# Altium PCB PCB1.PcbDoc
Units mm, origin at the board's own origin, x right, y up, seen from the top; angles counter-clockwise.
Board outline 47.4 x 47.4 mm, 2 copper layers (Top Layer, Bottom Layer); 44 components, 38 nets, 185 pads, 41 vias.
Unrouted connection lines stored in the file: 2.
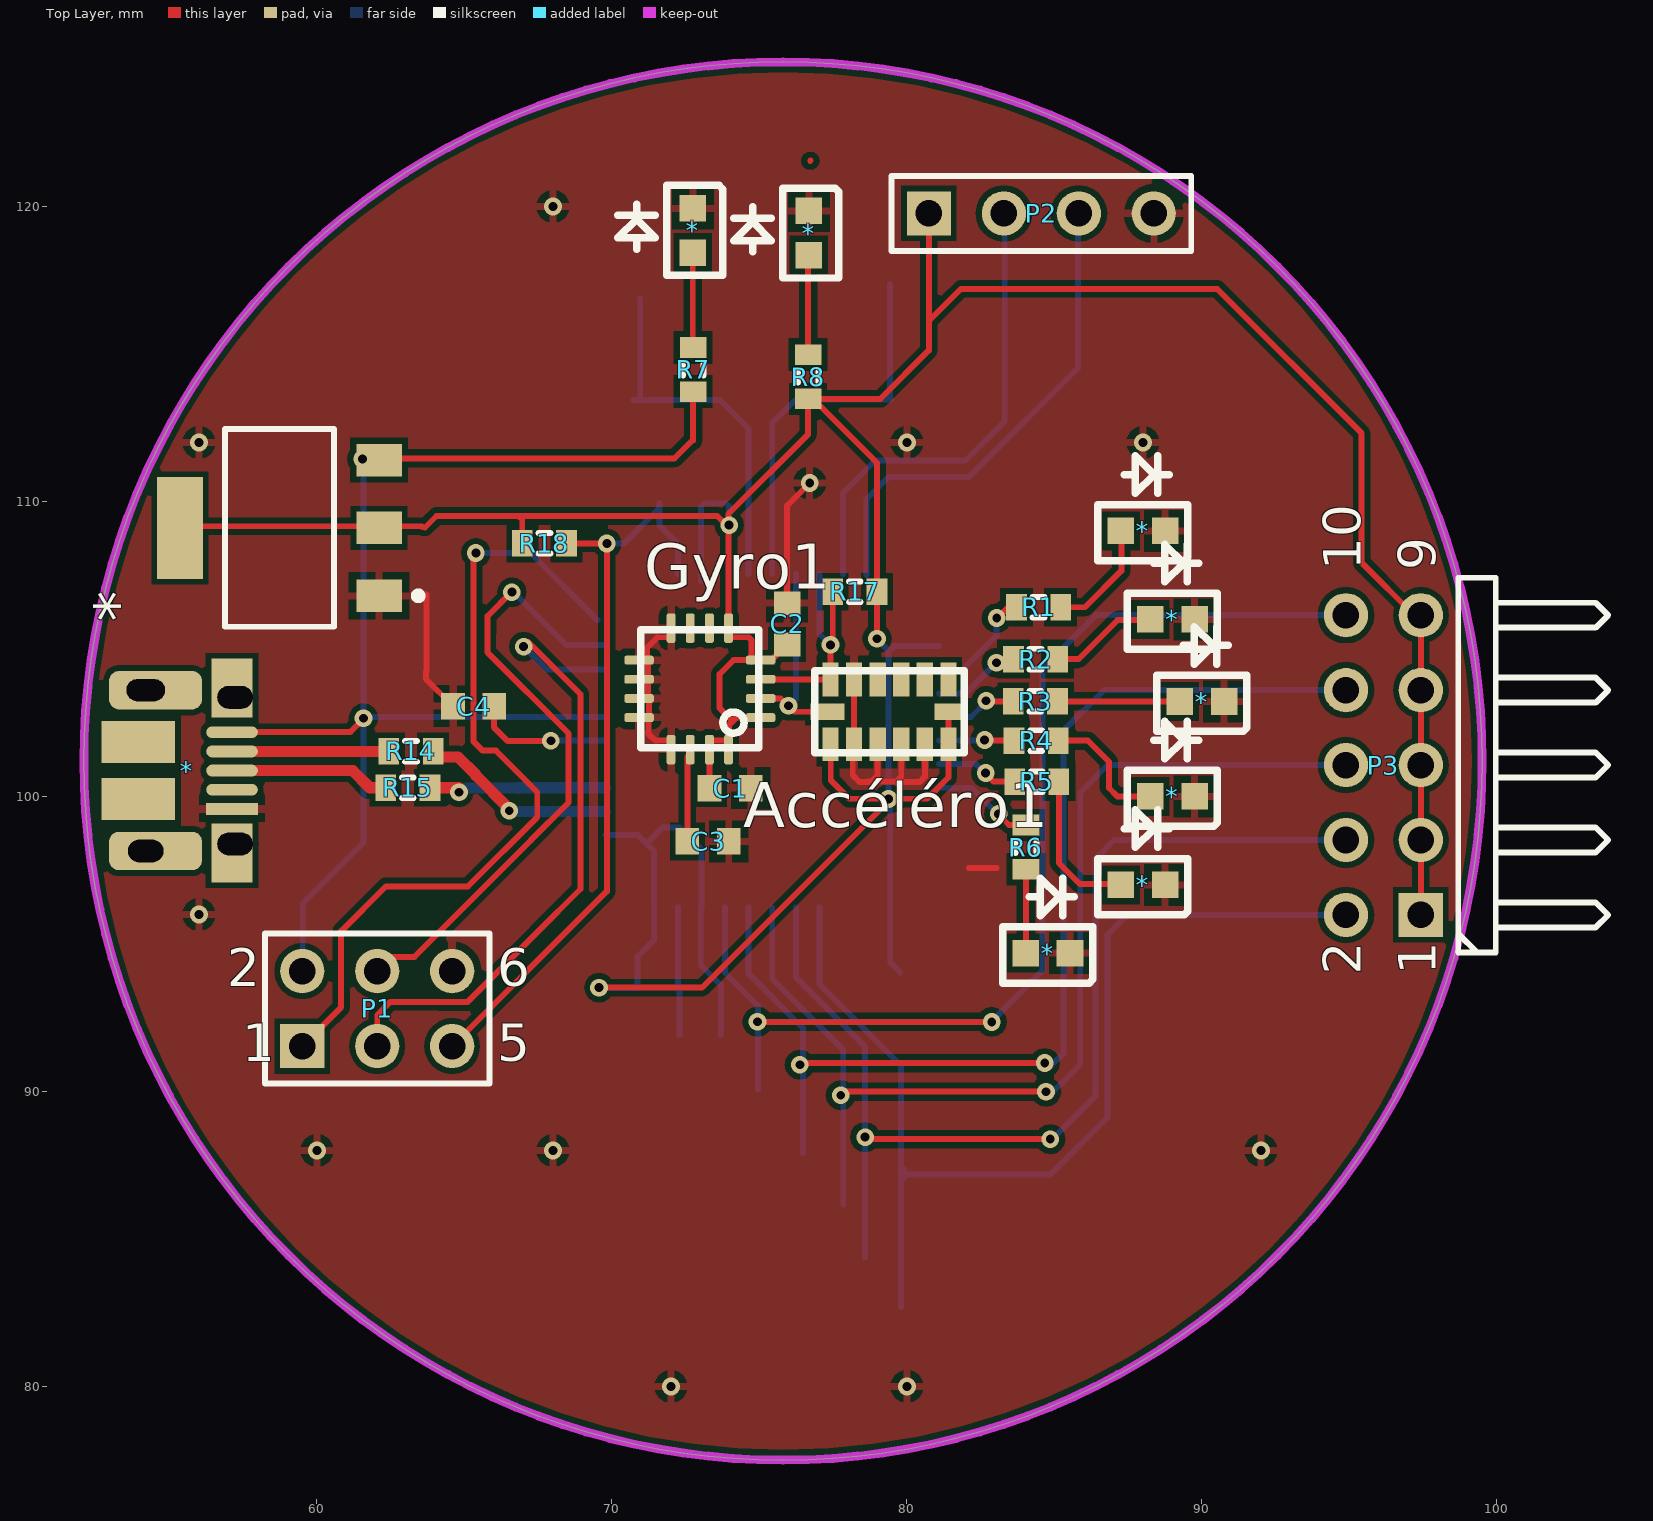
[diagram p0: Top Layer view]
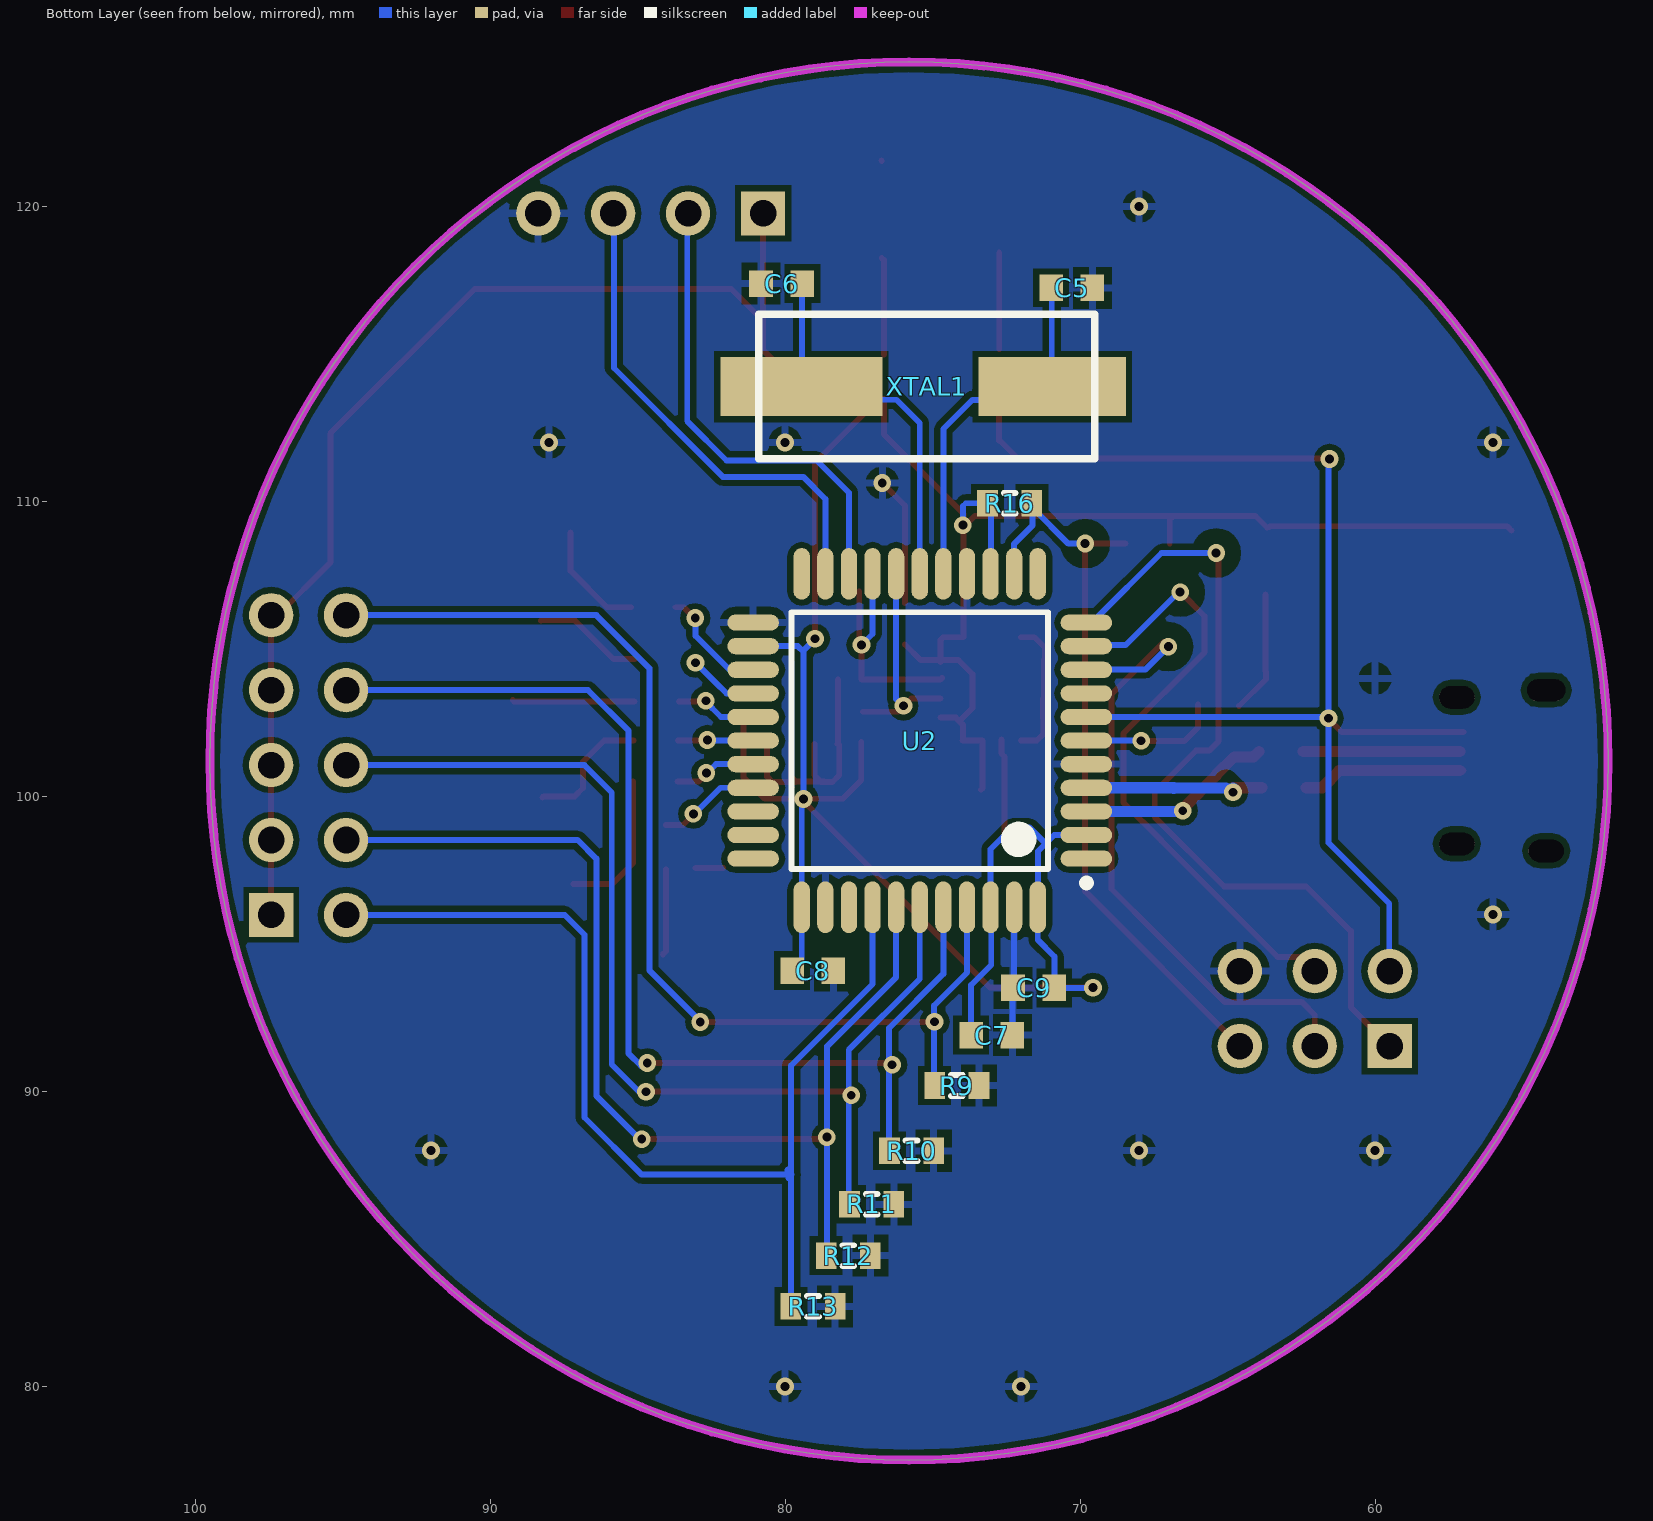
[diagram p1: Bottom Layer view, seen from below]

## Layer stack, top to bottom
Top Solder: solder mask 0.0102, Solder Resist, Dk 3.5
Top Layer: signal copper 0.0356
Dielectric 1: dielectric 0.32, FR-4, Dk 4.8
Bottom Layer: signal copper 0.0356
Bottom Solder: solder mask 0.0102, Solder Resist, Dk 3.5

## Board outline
75.8,77.5 cw(c75.8,101.2) 52.1,101.2 cw(c75.8,101.2) 75.8,124.9 cw(c75.8,101.2) 99.5,101.2 cw(c75.8,101.2)

## Design rules (kind name [scope] priority, off if disabled: settings)
Clearance [All] p1: gap=0.2
DiffPairsRouting [All] p1: maxlimit=0.254 minlimit=0.254 mostfreqgap=0.254 toplayer_minwidth=0.381 toplayer_maxwidth=0.381 toplayer_prefwidth=0.381 bottomlayer_minwidth=0.381 bottomlayer_maxwidth=0.381 bottomlayer_prefwidth=0.381 maxuncoupledlength=12.7
PolygonConnect [All] p1: connectstyle=Relief reliefconductorwidth=0.254 reliefentries=4 polygonreliefangle="90 Angle" airgapwidth=0.254
RoomDefinition handmouse [InComponentClass('handmouse')] p1: confinementstyle=ConfineOut formatcopy=TRUE lockcomponents=FALSE outline 0,0 50.8,0 50.8,25.4 0,25.4
RoutingVias RoutingVias_1 [All] p1: holewidth=0.3 width=0.6 viastyle="Through Hole" minholewidth=0.2 minwidth=0.4 maxholewidth=1 maxwidth=1.27
RoutingVias [All] p2: holewidth=0.6 width=1 viastyle="Through Hole" minholewidth=0.711 minwidth=1.27 maxholewidth=0.711 maxwidth=1.27
SolderMaskExpansion [All] p1: expansion=0.102
UnpouredPolygon [All] p1: allowunpoured=FALSE
Width [All] p1: maxlimit=0.2 minlimit=0.2 preferedwidth=0.2
28 further rules are at their usual default settings.

## Classes and differential pairs
component class handmouse: * Accéléro1 C1 C2 C3 C4 C5 C6 C7 C8 C9 Gyro1 P1 P2 P3 R1 R2 R3 R4 R5 R6 R7 R8 R9 R10 R11 R12 R13 R14 R15 R16 R17 R18 U2 XTAL1
differential pair D: +D_P -D_N
differential pair DR: +DR_P -DR_N

## Components (designator, comment, footprint, x,y, rotation, side; value= is the part's Value field where it differs from the comment)
* "LED" "LED 0603" 84.778,94.688 r0 top
* "LED" "LED 0603" 72.742,119.185 r90 top
* "LED" "LED 0603" 76.675,119.097 r90 top
* "LED" "LED 0603" 88,97 r0 top
* "LED" "LED 0603" 88,109 r0 top
* "LED" "LED 0603" 89,106 r0 top
* "LED" "LED 0603" 90,103.216 r0 top
* "LED" "LED 0603" 89,100 r0 top
* "REG1117-33" SOT-223 58.735,109.101 r90 top
* "microUSB" microUSB 52.498,100.875 r270 top
Accéléro1 "ADXL345" LGA-14 79.409,102.869 r90 top
C1 "Cap Semi" 1608[0603] 74.007,100.279 r180 top
C2 "Cap Semi" 1608[0603] 75.936,105.849 r270 top
C3 "Cap Semi" 1608[0603] 73.261,98.477 r180 top
C4 "Cap Semi" 1608[0603] 65.313,103.062 r180 top
C5 "Cap Semi" 1608[0603] 70.284,117.241 r0 bottom
C6 "Cap Semi" 1608[0603] 80.116,117.382 r180 bottom
C7 "Cap Semi" 1608[0603] 72.996,91.907 r0 bottom
C8 "Cap Semi" 1608[0603] 79.063,94.095 r0 bottom
C9 "Cap Semi" 1608[0603] 71.575,93.506 r180 bottom
Gyro1 "L3GD20" QFN16 72.98,103.645 r180 top
P1 "Header 3X2" HDR2X3 59.504,91.537 r0 top
P2 "Header 4" HDR1X4 80.748,119.762 r0 top
P3 "Header 5X2H" HDR2X5H 97.421,95.982 r90 top
R1 "Res3" J1-0603 84.464,106.413 r180 top
R2 "Res3" J1-0603 84.361,104.654 r180 top
R3 "Res3" J1-0603 84.355,103.223 r180 top
R4 "Res3" J1-0603 84.382,101.893 r180 top
R5 "Res3" J1-0603 84.401,100.498 r180 top
R6 "Res3" J1-0603 84.037,98.28 r90 top
R7 "Res3" J1-0603 72.755,114.469 r90 top
R8 "Res3" J1-0603 76.652,114.226 r90 top
R9 "Res3" J1-0603 74.178,90.199 r180 bottom
R10 "Res3" J1-0603 75.712,87.988 r180 bottom
R11 "Res3" J1-0603 77.066,86.174 r180 bottom
R12 "Res3" J1-0603 77.859,84.437 r180 bottom
R13 "Res3" J1-0603 79.053,82.71 r180 bottom
R14 "Res3" J1-0603 63.189,101.526 r0 top
R15 "Res3" J1-0603 63.083,100.295 r0 top
R16 "Res3" J1-0603 72.387,109.937 r180 bottom
R17 "Res3" J1-0603 78.236,106.939 r0 top
R18 "Res3" J1-0603 67.713,108.579 r0 top
U2 "ATmega32U4-AU" 44ML_N 75.435,101.892 r0 bottom
XTAL1 "Crystal" HC49-CMS 75.195,113.89 r180 bottom

## Footprints (in the part's own frame and the unit in brackets; to place one, negate y for a bottom-side part, rotate by r counter-clockwise, add the part's x,y. Pads: shape width x height; smd on the part's side, far side on the other; paste and mask are expansions set on the pad)
44ML_N [mm] "Thin QFP, 44-Leads, Body 10x10mm, Pitch 0.8mm, IPC Medium Density"
  oval 1.75x0.55 smd: 1(-5.65,4) 2(-5.65,3.2) 3(-5.65,2.4) 4(-5.65,1.6) 5(-5.65,0.8) 6(-5.65,0) 7(-5.65,-0.8) 8(-5.65,-1.6) 9(-5.65,-2.4) 10(-5.65,-3.2) 11(-5.65,-4) 23(5.65,-4) 24(5.65,-3.2) 25(5.65,-2.4) 26(5.65,-1.6) 27(5.65,-0.8) 28(5.65,0) 29(5.65,0.8) 30(5.65,1.6) 31(5.65,2.4) 32(5.65,3.2) 33(5.65,4)
  oval 0.55x1.75 smd: 12(-4,-5.65) 13(-3.2,-5.65) 14(-2.4,-5.65) 15(-1.6,-5.65) 16(-0.8,-5.65) 17(0,-5.65) 18(0.8,-5.65) 19(1.6,-5.65) 20(2.4,-5.65) 21(3.2,-5.65) 22(4,-5.65) 34(4,5.65) 35(3.2,5.65) 36(2.4,5.65) 37(1.6,5.65) 38(0.8,5.65) 39(0,5.65) 40(-0.8,5.65) 41(-1.6,5.65) 42(-2.4,5.65) 43(-3.2,5.65) 44(-4,5.65)
  silkscreen extent -5.77,-4.35 4.35,4.95, body extent -5,-5 5,5, height 1.2
1608[0603] [mm] "Chip Capacitor, Body 1.6x0.8mm, IPC High Density"
  rect 0.8x0.9 smd: 1(-0.7,0) 2(0.7,0)
  body extent -0.87,-0.48 0.87,0.48, height 1.3
HC49-CMS [mm]
  rect 5x2 smd: 1(4.25,0)
  rect 5.5x2 smd: 2(-4.25,0)
  silkscreen extent -5.7,-2.45 5.7,2.45, body extent -6.15,-2.35 6.15,2.35, height 4.31
HDR1X4 [mm] "Connector; Header; 4 Position"
  rect 1.5x1.5 hole 0.9: 1(0,0)
  round 1.5 hole 0.9: 2(2.54,0) 3(5.08,0) 4(7.62,0)
  silkscreen extent -1.27,-1.27 8.89,1.27
HDR2X3 [mm] "Connector; Header; 3x2 Position"
  rect 1.5x1.5 hole 0.9: 1(0,0)
  round 1.5 hole 0.9: 2(0,2.54) 3(2.54,0) 4(2.54,2.54) 5(5.08,0) 6(5.08,2.54)
  silkscreen extent -1.27,-1.27 6.35,3.81
HDR2X5H [mm] "Connector; Header; 5x2 Position; Right Angle"
  rect 1.5x1.5 hole 0.9: 1(0,0)
  round 1.5 hole 0.9: 2(0,2.54) 3(2.54,0) 4(2.54,2.54) 5(5.08,0) 6(5.08,2.54) 7(7.62,0) 8(7.62,2.54) 9(10.16,0) 10(10.16,2.54)
  silkscreen extent -1.27,-6.35 11.43,-1.27
J1-0603 [mm] "Chip Resistor, Body 1.6x0.8mm, IPC High Density"
  rect 0.7x0.9 smd: 1(-0.75,0) 2(0.75,0)
  silkscreen extent -0.2,-0.35 0.2,0.35, body extent -0.85,-0.48 0.85,0.48, height 0.9
"LED 0603" [mm]
  rect 0.9x0.9 smd: 1(-0.75,0) 2(0.75,0)
  silkscreen extent -1.52,-1.02 1.52,2.54, body extent -0.85,-0.45 0.85,0.45
LGA-14 [mm]
  rect 1.145x0.55 smd: 1(-1.098,2) 2(-1.098,1.2) 3(-1.098,0.4) 4(-1.098,-0.4) 5(-1.098,-1.2) 6(-1.098,-2) 8(1.098,-2) 9(1.098,-1.2) 10(1.098,-0.4) 11(1.098,0.4) 12(1.098,1.2) 13(1.098,2)
  rect 0.55x1.145 smd: 7(0,-2.097) 14(0,2.097)
  silkscreen extent -1.4,-2.54 1.4,2.54, body extent -1.52,-2.5 1.48,2.5, height 1.03
microUSB [mm]
  oval 0.4x1.75 smd: 1(-1.3,4.625) 2(-0.65,4.625) 3(0,4.625) 4(0.65,4.625)
  rect 0.4x1.75 smd: 5(1.3,4.625)
  rect 2x1.4 smd: GND(-2.794,4.625) GND(2.794,4.625)
  oct 0.7x1.2 hole 0.75 slot 1.3 at 90 deg: GND(-2.725,1.7)
  rrect50% 1.3x3.15 smd: GND(-2.725,2.032) GND(2.725,2.032)
  oval 0.7x1.2 hole 0.762 slot 1.2 at 90 deg: GND(-2.485,4.73) GND(2.485,4.73) GND(2.725,1.7)
  rect 1.425x2.5 smd: GND(-0.962,1.45) GND(0.962,1.45)
  body extent -4.02,-0.95 4.02,5.6, height 2.73
QFN16 [mm]
  rrect50% 1x0.3 smd: 1(-2.06,0.975) 2(-2.06,0.325) 3(-2.06,-0.325) 4(-2.06,-0.975) 9(2.06,-0.975) 10(2.06,-0.325) 11(2.06,0.325) 12(2.06,0.975)
  rrect50% 0.3x1 smd: 5(-0.975,-2.06) 6(-0.325,-2.06) 7(0.325,-2.06) 8(0.975,-2.06) 13(0.975,2.06) 14(0.325,2.06) 15(-0.325,2.06) 16(-0.975,2.06)
  silkscreen extent -2,-2 2,2, body extent -2.13,-2.13 2.13,2.13, height 0.85
SOT-223 [mm]
  rect 1.1x1.55 smd: 1(-2.3,-3.375) 2(0,-3.375) 3(2.3,-3.375)
  rect 3.45x1.55 smd: 4(0,3.375)
  silkscreen extent -3.35,-4.83 3.35,1.85, body extent -3.25,-3.42 3.25,3.67, height 1.65

## Part data
C1 C2 C3 C4 C5 C6 C7 C8 C9: "Capacitor (Semiconductor SIM Model)"
P1: "Header, 3-Pin, Dual row"
P2: "Header, 4-Pin"
P3: "Header, 5-Pin, Dual row, Right Angle"
R1 R2 R3 R4 R5 R6 R7 R8 R9 R10 R11 R12 R13 R14 R15 R16 R17 R18: "Resistor"
U2: "8-bit AVR Microcontroller, 2.7-5.5V, 32KB Flash, 2.5KB EEPROM, 1KB SRAM, USB Controller, 44-pin TQFP, Industrial Grade (-40°C to 85°C)"

## Via types
v1: diameter 0.6, hole 0.3, Top Layer to Bottom Layer, 41 vias

## Nets (pads, with @x,y where several pads share a name; then routed paths per layer and width w, separated by ;. In a path a pad name is that pad's centre, name@x,y a point inside that pad or via, vN(x,y) a via of type N, cw(c..) or ccw(c..) an arc to the next point about the centre after c; other vN are vias at no path point)
3V3: *.2@62.11,109.101 *.4@55.36,109.101 Accéléro1.1 Accéléro1.6 Accéléro1.7 C1.2 C2.2 C7.2 C8.2 C9.2 Gyro1.1 Gyro1.4 Gyro1.5 Gyro1.15 Gyro1.16 P2.1 P3.1 P3.3 P3.5 P3.7 P3.9 R8.1 R16.2 R17.2 R18.1 U2.2 U2.14 U2.24 U2.34 U2.42 U2.44 | length 146.3
  Top Layer w0.2: *.4@55.38,109.014 55.524,109.158 63.559,109.158 63.586,109.131 ; 63.665,109.118 64.052,109.505 73.568,109.505 v1@73.955,109.118 ; 66.891,109.457 66.963,109.386 R18.1 ; v1(69.564,93.518) 73.052,93.518 v1@79.426,99.891 ; C1.2@73.36,100.225 73.305,100.28 73.305,101.895 Gyro1.16@73.981,101.895 ; Gyro1.16@73.973,101.897 73.973,102.432 74.211,102.67 Gyro1.1@74.73,102.67 ; 74.083,102.561 73.651,102.993 73.651,104.147 74.124,104.62 Gyro1.4@74.73,104.62 ; Gyro1.4@74.736,104.557 74.736,105.297 74.637,105.395 73.955,105.395 v1@73.955,109.118 ; Gyro1.4@74.74,104.629 75.417,104.629 C2.2 ; R8.1@76.865,113.431 78.986,111.31 R17.2 v1(78.986,105.346) ; Accéléro1.1@77.417,101.848 77.417,100.549 78.045,99.921 v1@79.387,99.921 ; v1(79.375,99.909) v1@79.387,99.921 ; P2.1@80.758,119.755 80.746,119.743 80.746,116.117 ; Accéléro1.7@81.473,102.814 81.409,102.75 Accéléro1.6 81.409,100.645 80.685,99.921 v1@79.387,99.921 ; P3.5@97.32,100.957 97.421,100.856 P3.3 ; P3.9@97.365,106.034 97.421,105.978 P3.7 ; P3.7@97.376,103.492 97.421,103.448 P3.5 ; P3.3@97.383,98.445 97.421,98.407 P3.1 ; P3.9@97.423,106.116 97.224,106.116 95.415,107.925 95.415,112.305 90.519,117.202 81.83,117.202 80.746,116.117 ; v1@73.955,109.118 73.955,109.577 76.652,112.274 R8.1 79.103,113.476 80.746,115.119 80.746,116.117
  Bottom Layer w0.2: v1(69.564,93.518) 69.553,93.506 C9.2 ; U2.2 70.878,98.692 71.427,98.142 U2.44@71.427,96.213 ; C9.2@70.84,93.514 70.865,93.539 70.865,94.566 71.435,95.137 U2.44 ; 71.233,98.458 71.725,98.95 72.294,98.95 73.035,98.209 U2.42 ; U2.42@73.011,96.29 73.011,94.286 73.696,93.601 C7.2 ; U2.14@73.017,107.301 73.017,109.817 73.137,109.937 73.878,109.937 ; v1(73.973,109.196) 73.973,109.841 ; v1(78.986,105.346) 79.39,104.942 ; v1@79.369,99.915 v1@79.372,99.911 ; 79.372,104.686 v1@79.372,99.911 ; v1(79.375,99.909) v1@79.372,99.911 ; 79.377,104.591 79.377,104.897 79.571,105.092 U2.24 ; v1@79.435,99.737 U2.34 79.435,94.373 C8.2@79.775,94.033
5V: *.1@57.123,102.175 *.3@62.11,111.401 P1.2 R7.1 U2.7 | length 44.2
  Top Layer w0.2: *.1@57.008,102.181 61.132,102.181 v1@61.567,102.615 ; *.3@61.591,111.439 61.61,111.458 72.12,111.458 72.718,112.055 72.753,112.055 R7.1@72.753,113.71
  Bottom Layer w0.2: P1.2@59.519,94.094 59.519,96.369 61.579,98.429 v1(61.579,102.651) ; v1@61.579,111.391 v1(61.579,102.651) ; U2.7 61.619,102.692 v1(61.579,102.651)
  other v1: 61.537,111.439 61.555,111.439
D1: P3.10 R9.1 U2.41 | length 38.3
  Top Layer w0.2: v1(74.934,92.359) v1@82.904,92.359
  Bottom Layer w0.2: U2.41 73.835,94.027 74.955,92.907 R9.1@74.955,90.064 ; v1@82.874,92.379 84.6,94.105 84.6,104.343 86.399,106.142 P3.10
  other v1: 82.874,92.355
D2: P3.8 R10.1 U2.40 | length 39.1
  Top Layer w0.2: v1@76.333,90.953 76.34,90.96 v1(84.67,90.96)
  Bottom Layer w0.2: U2.40 74.635,93.986 76.476,92.145 R10.1@76.476,87.917 ; v1@84.885,90.865 85.315,91.295 85.315,102.238 86.68,103.602 P3.8
  other v1: 76.371,90.906
D3: P3.6 R11.1 U2.39 | length 38.1
  Top Layer w0.2: v1@77.755,89.87 77.875,89.99 v1(84.718,89.99)
  Bottom Layer w0.2: U2.39 75.435,93.813 77.841,91.407 R11.1@77.841,86.158 ; v1@84.883,89.919 85.876,90.913 85.876,100.134 86.805,101.062 P3.6
  other v1: 77.76,89.872
D4: P3.4 R12.1 U2.38 | length 37.7
  Top Layer w0.2: v1@78.656,88.383 v1(84.86,88.383)
  Bottom Layer w0.2: U2.38 76.235,93.87 78.576,91.529 R12.1@78.576,84.388 ; v1@85.049,88.501 86.398,89.85 86.398,97.89 87.031,98.522 P3.4
  other v1: 78.583,88.451
D5: P3.2 R13.1 U2.37 | length 37.1
  Bottom Layer w0.2: U2.37 77.035,93.635 79.796,90.875 79.796,87.177 ; 79.776,87.177 79.796,87.177 ; R13.1@79.796,82.683 79.796,87.177 ; P3.2 87.471,95.982 86.798,95.31 86.798,89.116 84.86,87.177 79.796,87.177
  Bottom Layer w0.254: 79.838,87.08 79.866,87.08 ; 79.898,87.318 79.898,87.334
D_N: *.2@57.123,101.525 R14.1 | length 5.3
  Top Layer w0.381: *.2@57.123,101.525 61.898,101.525 R14.1
D_P: *.3@57.123,100.875 R15.1 | length 5.5
  Top Layer w0.2: *.3@57.008,100.881 *.3@57.025,100.864
  Top Layer w0.381: *.3@57.123,100.875 61.212,100.875 61.792,100.295 R15.1
DR_N: R14.2 U2.3 | length 6.7
  Top Layer w0.381: R14.2 64.13,101.335 64.785,101.335 65.387,100.734 65.387,100.712 66.52,99.579 v1(66.52,99.515)
  Bottom Layer w0.381: v1(66.52,99.515) 66.647,99.515 66.67,99.492 U2.3
DR_P: R15.2 U2.4 | length 6.1
  Top Layer w0.381: R15.2 64.814,100.295 64.845,100.263 64.845,100.171 v1(64.814,100.14)
  Bottom Layer w0.381: v1(64.814,100.14) v1@64.814,100.288 ; v1@65.052,100.288 66.8,100.288 66.822,100.265 66.822,100.292 U2.4
GND: *.1@62.11,106.801 *.2@72.742,119.935 *.2@76.675,119.847 *.2@85.528,94.688 *.2@88.75,97 *.2@88.75,109 *.2@89.75,100 *.2@89.75,106 *.2@90.75,103.216 *.5 Accéléro1.2 Accéléro1.3 Accéléro1.4 Accéléro1.5 Accéléro1.12 C1.1 C2.1 C3.1 C4.2 C5.1 C6.1 C7.1 C8.1 C9.1 Gyro1.8 Gyro1.9 Gyro1.10 Gyro1.11 Gyro1.12 Gyro1.13 P1.6 P2.4 R9.2 R10.2 R11.2 R12.2 R13.2 U2.5 U2.15 U2.23 U2.35 U2.43 | length 28.6
  Top Layer w0.2: 63.706,104.245 63.695,104.234 63.695,103.98 C4.2 ; 63.712,104.229 63.712,106.85 ; Gyro1.9@71.188,104.614 71.188,105.038 71.545,105.395 Gyro1.8@72.005,105.395 ; Gyro1.9@71.23,104.62 71.23,103.944 71.229,103.943 71.229,103.346 71.254,103.32 Gyro1.12@71.254,102.643 ; Gyro1.12@71.237,102.744 71.237,102.126 71.468,101.895 Gyro1.13@72.005,101.895 ; C2.1 75.936,109.857 v1(76.704,110.625) ; Accéléro1.2@78.163,101.761 78.163,100.72 78.392,100.491 78.779,100.491 79.009,100.721 Accéléro1.3 ; Accéléro1.12 78.209,101.777 Accéléro1.2@78.219,101.766 ; 78.657,100.49 78.676,100.509 79.623,100.509 79.642,100.49 80.432,100.49 80.609,100.666 Accéléro1.5 ; 79.637,100.503 79.809,100.675 Accéléro1.4 ; 82.098,97.572 83.042,97.572
  Bottom Layer w0.2: U2.43 72.235,93.519 C9.1@72.249,93.506 ; C9.1@72.274,93.572 72.296,93.549 C7.1
  other v1: 72,80 80,80 60,88 68,88 92,88 56,96 56,112 80,112 88,112 68,120
LED1: R1.2 U2.25 | length 3.9
  Top Layer w0.2: v1@83.036,106.018 83.431,106.413 R1.2
  Bottom Layer w0.2: U2.25 81.887,104.292 83.04,105.444 v1@83.04,106.052
  other v1: 83.046,106.045
LED2: R2.2 U2.26 | length 2.4
  Bottom Layer w0.2: U2.26 81.986,103.492 82.386,103.892 82.388,103.892 83.014,104.518 v1@83.014,104.519
  other v1: 83.04,104.532
LED3: R3.2 U2.27 | length 2.8
  Top Layer w0.2: v1@82.699,103.24 82.717,103.223 R3.2
  Bottom Layer w0.2: U2.27 82.17,102.692 v1@82.703,103.224
  other v1: 82.686,103.244
LED4: R4.2 U2.28 | length 2.5
  Top Layer w0.2: v1@82.652,101.891 82.655,101.893 R4.2
  Bottom Layer w0.2: U2.28 v1@82.632,101.892
  other v1: 82.636,101.913
LED5: R5.2 U2.29 | length 2.8
  Top Layer w0.2: v1@82.638,100.796 82.935,100.498 R5.2
  Bottom Layer w0.2: U2.29 82.342,101.092 v1@82.638,100.796
  other v1: 82.67,100.796
LED6: R6.2 U2.30 | length 3.4
  Top Layer w0.2: v1@83.098,99.395 83.462,99.03 R6.2
  Bottom Layer w0.2: U2.30 82.188,100.292 v1@83.072,99.407
  other v1: 83.11,99.407
MISO: P1.1 U2.11 | length 27.9
  Top Layer w0.2: P1.1 60.823,92.856 60.823,95.432 62.344,96.953 65.125,96.953 67.469,99.297 67.469,100.151 66.069,101.55 65.62,101.55 65.313,101.858 65.313,108.175 v1(65.389,108.251)
  Bottom Layer w0.2: v1(65.389,108.251) 67.239,108.251 U2.11@69.518,105.972
MOSI: P1.4 U2.10 | length 21.4
  Top Layer w0.2: P1.4 62.504,94.537 62.484,94.556 63.304,94.556 67.253,98.505 67.253,98.515 68.533,99.795 68.533,101.637 68.531,101.64 68.531,102.137 65.778,104.89 65.778,105.5 65.789,105.511 65.789,106.117 v1@66.607,106.936
  Bottom Layer w0.2: v1(66.61,106.924) 66.665,106.924 68.457,105.133 69.758,105.133 U2.10@69.758,105.111
Net*_1: *.1@84.028,94.688 R6.1 | length 2.9
  Top Layer w0.2: R6.1 84.037,94.754 *.1@84.145,94.646
Net*_1: *.1@87.25,97 R5.1 | length 5.1
  Top Layer w0.2: R5.1 85.151,97.743 85.868,97.026 *.1@87.181,97.026
Net*_1: *.1@88.25,100 R4.1 | length 4.4
  Top Layer w0.2: R4.1 86.13,101.893 86.848,101.174 86.848,100.282 87.13,100.001 88.193,100.001 *.1@88.23,99.964
Net*_1: *.1@89.25,103.216 R3.1 | length 4.1
  Top Layer w0.2: R3.1 89.188,103.223 *.1@89.232,103.267
Net*_1: *.1@88.25,106 R2.1 | length 3.7
  Top Layer w0.2: R2.1 85.816,104.654 87.143,105.981 88.246,105.981 *.1@88.273,105.954
Net*_1: *.1@87.25,109 R1.1 | length 3.9
  Top Layer w0.2: R1.1 86.038,106.413 87.269,107.644 *.1@87.269,108.943
Net*_1: *.1@76.675,118.347 R8.2 | length 3.3
  Top Layer w0.2: R8.2 76.652,118.176 *.1@76.722,118.246
Net*_1: *.1@72.742,118.435 R7.2 | length 3.3
  Top Layer w0.2: R7.2@72.742,115.163 *.1@72.742,118.435
NetC3_2: C3.2 Gyro1.14 | length 3.5
  Top Layer w0.2: C3.2 72.561,101.349 72.66,101.448 Gyro1.14@72.66,101.926
NetC4_1: C4.1 U2.6 | length 4.7
  Top Layer w0.2: C4.1@66,103.112 66,102.348 66.475,101.873 67.905,101.873 v1@67.91,101.878
  Bottom Layer w0.2: v1@67.972,101.873 67.991,101.892 U2.6
  other v1: 67.931,101.888
RESET: P1.5 R18.2 U2.13 | length 25.6
  Top Layer w0.2: P1.5 69.829,96.782 v1(69.829,108.57) ; R18.2 69.723,108.579 v1@69.756,108.545
  Bottom Layer w0.2: v1(69.829,108.57) 70.397,108.57 71.588,109.761 71.588,109.89 ; 71.609,109.951 71.609,109.187 72.235,108.561 U2.13
RXD1: P2.2 U2.20 | length 16.4
  Bottom Layer w0.2: U2.20 77.835,110.293 78.931,111.39 81.984,111.39 83.316,112.722 P2.2@83.316,119.902
SCL: Accéléro1.14 Gyro1.2 R16.1 U2.18 | length 7.4
  Top Layer w0.2: Gyro1.2@74.73,103.32 75.718,103.32 76.167,102.871 Accéléro1.14@77.361,102.871
  Bottom Layer w0.2: v1@75.998,103.071 76.235,103.308 U2.18
  other v1: 75.988,103.071
SCLK: P1.3 U2.9 | length 22.2
  Top Layer w0.2: P1.3 62.044,92.592 62.489,93.037 64.14,93.037 64.149,93.027 65.101,93.027 67.449,95.375 67.449,95.377 68.933,96.861 68.933,103.462 67.163,105.232 v1(67.008,105.078)
  Bottom Layer w0.2: v1(67.008,105.078) 67.779,104.307 U2.9@69.842,104.307
SDA: Accéléro1.13 Gyro1.3 R17.1 U2.19 | length 8.4
  Top Layer w0.2: Gyro1.3@74.678,104.018 74.729,103.967 Accéléro1.13 77.409,105.143 v1@77.413,105.148 ; v1@77.412,105.179 77.486,105.254 R17.1
  Bottom Layer w0.2: U2.19 77.035,105.505 v1@77.454,105.086
  other v1: 77.413,105.137
TXD1: P2.3 U2.21 | length 16.8
  Bottom Layer w0.2: U2.21@78.628,107.498 78.628,110.076 79.383,110.831 82.113,110.831 85.801,114.519 85.801,119.736 P2.3
XTAL1: C6.2 U2.17 XTAL1.2 | length 13.3
  Bottom Layer w0.2: U2.17 75.435,112.656 76.224,113.444 XTAL1.2@79.464,113.444 ; XTAL1.2@79.408,113.5 79.425,113.518 C6.2@79.425,117.351
XTAL2: C5.2 U2.16 XTAL1.1 | length 12.6
  Bottom Layer w0.2: XTAL1.1@70.725,113.443 73.647,113.443 74.635,112.456 U2.16 ; XTAL1.1@70.959,113.483 C5.2@70.959,116.886
pads on no net: *.4@57.123,100.225 *.GND Accéléro1.8 Accéléro1.9 Accéléro1.10 Accéléro1.11 Gyro1.6 Gyro1.7 U2.1 U2.8 U2.12 U2.22 U2.31 U2.32 U2.33 U2.36
copper on no net: | length 0
  Top Layer w0.2: 76.724,121.544 76.734,121.553

## Polygon pours and split planes (outlines as drawn)
GND on Bottom Layer "Top Layer-No Net" (solid, remove dead copper, pour order 2): 47.223,130.646 53.891,137.314 103.292,137.314 103.292,74.169 100.162,71.039 52.122,71.039 47.223,75.938 47.274,75.989 47.274,130.646
GND on Top Layer "Top Layer-No Net" (solid, remove dead copper, pour order 4): 46.702,131.745 47.927,132.97 107.806,132.97 107.806,79.351 102.635,74.179 51.548,74.179 46.49,79.238 46.917,79.665 46.917,131.96

## Keep-outs
Keep-Out Layer:
  circle w0.3: c75.8,101.2 r23.7

## Silkscreen, mask and mechanical layers (free items; w line width, h text height)
Drill Drawing:
  text "HAndMouse 2" at 67.826,80.421 h1.52
  text "Drill Drawing." at 105.88,78.74 h1.52

## Dimensions
99.5,101.2 to 52.1,101.2 on Mechanical 1

## Text inside footprints (layer, text, board x,y; h text height)
P1: Top Overlay "6" at 66.108,93.569 h1.27; Top Overlay "5" at 66.108,91.029 h1.27; Top Overlay "2" at 56.964,93.569 h1.27; Top Overlay "1" at 57.472,91.029 h1.27
P3: Top Overlay "2" at 95.389,93.95 h1.27 r90; Top Overlay "1" at 97.929,93.95 h1.27 r90; Top Overlay "9" at 97.929,107.666 h1.27 r90; Top Overlay "10" at 95.389,107.666 h1.27 r90